# Altium PCB FPv1.3.5.PcbDoc (part 4 of 9)
Units mil, origin at the board's own origin, x right, y up, seen from the top; angles counter-clockwise.
Board outline 3200 x 2100 mil, 4 copper layers (Top Layer, GROUND PLANE, POWER PLANE, Bottom Layer); 98 components, 183 nets, 614 pads, 312 vias.
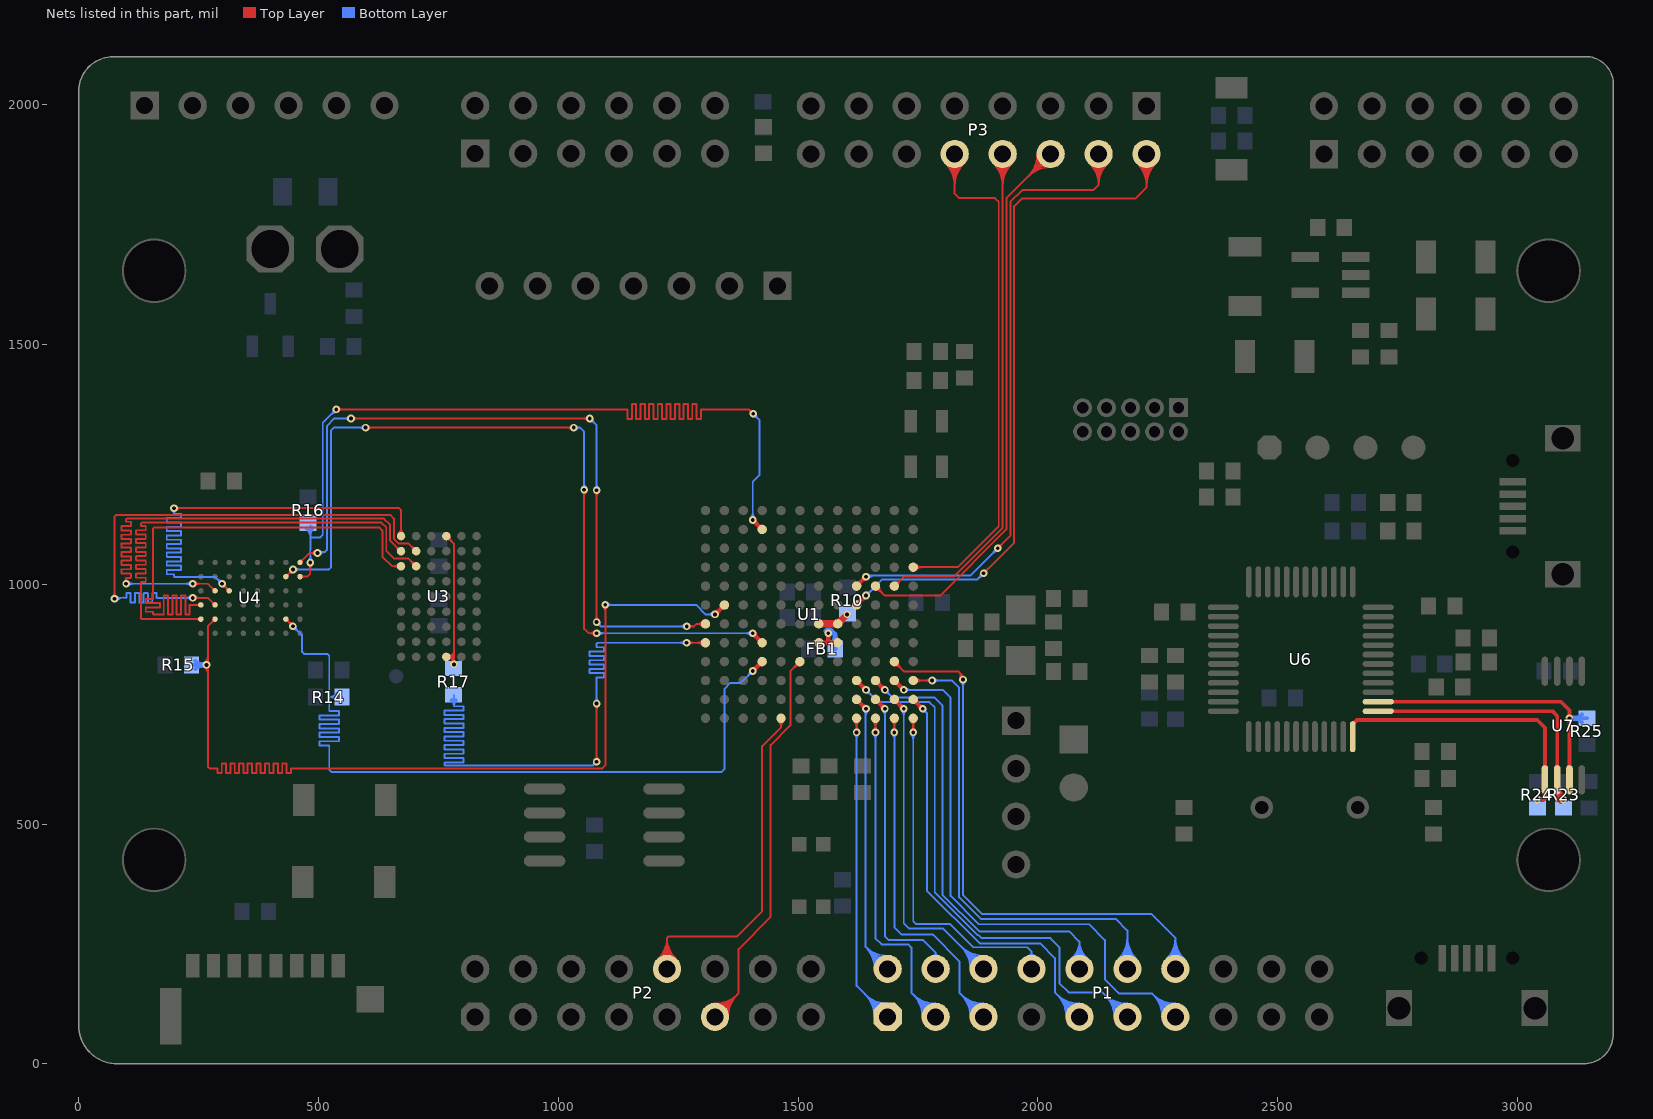
[diagram p6: the nets of this part, all layers, seen from the top]

## Via types
v1: diameter 15.87, hole 7.87, Top Layer to Bottom Layer, tented both sides, 261 vias
v2: diameter 19.8, hole 11.81, Top Layer to Bottom Layer, tented both sides, 25 vias
v3: diameter 23.62, hole 15.75, Top Layer to Bottom Layer, tented both sides, 11 vias
v4: diameter 20, hole 13, Top Layer to Bottom Layer, tented both sides, 5 vias
v5: diameter 27.68, hole 15.75, Top Layer to Bottom Layer, tented both sides, 3 vias
v6: diameter 23.74, hole 15.75, Top Layer to Bottom Layer, tented both sides, 2 vias
v7: diameter 19.8, hole 9.84, Top Layer to Bottom Layer, tented both sides, 2 vias
v8: diameter 23.62, hole 9.45, Top Layer to Bottom Layer, tented both sides, 1 vias
v9: diameter 17.24, hole 9.06, Top Layer to Bottom Layer, tented both sides, 1 vias
v10: diameter 23.74, hole 11.81, Top Layer to Bottom Layer, tented both sides, 1 vias

## Nets (pads, with @x,y where several pads share a name; then routed paths per layer and width w, separated by ;. In a path a pad name is that pad's centre, name@x,y a point inside that pad or via, vN(x,y) a via of type N, cw(c..) or ccw(c..) an arc to the next point about the centre after c; other vN are vias at no path point) (continued)
ADDR11: U3.C1 U4.H4 | length 1243.9
  Top Layer w4: U4.H4@252.3,954.07 ccw(c245.97,947.74) 245.97,956.69 ccw(c245.97,965.65) U4.H4@252.3,959.32 ; U4.H4@254.92,956.69 232.4,956.69 ccw(c232.4,955.79) 231.5,955.79 231.5,937.59 cw(c230.6,937.59) 230.6,936.69 223.4,936.69 cw(c223.4,937.59) 222.5,937.59 222.5,975.79 ccw(c221.6,975.79) 221.6,976.69 214.4,976.69 ccw(c214.4,975.79) 213.5,975.79 213.5,937.59 cw(c212.6,937.59) 212.6,936.69 205.4,936.69 cw(c205.4,937.59) 204.5,937.59 204.5,975.79 ccw(c203.6,975.79) 203.6,976.69 196.4,976.69 ccw(c196.4,975.79) 195.5,975.79 195.5,937.59 cw(c194.6,937.59) 194.6,936.69 187.4,936.69 cw(c187.4,937.59) 186.5,937.59 186.5,975.79 ccw(c185.6,975.79) 185.6,976.69 178.4,976.69 ccw(c178.4,975.79) 177.5,975.79 177.5,937.59 cw(c176.6,937.59) 176.6,936.69 156.31,936.69 155,938 155,941.6 ccw(c154.1,941.6) 154.1,942.5 140.9,942.5 cw(c140.9,943.4) 140,943.4 140,950.6 cw(c140.9,950.6) 140.9,951.5 155,951.5 169.1,951.5 ccw(c169.1,952.4) 170,952.4 170,959.6 ccw(c169.1,959.6) 169.1,960.5 155,960.5 140.9,960.5 cw(c140.9,961.4) 140,961.4 140,968.6 cw(c140.9,968.6) 140.9,969.5 155,969.5 155,970 155,1116 157.43,1118.43 626.57,1118.43 633.39,1111.61 633.39,1057.56 653.54,1037.4 U3.C1@672.24,1037.4 ; U3.C1@667.39,1032.55 ccw(c655.69,1020.84) 655.69,1037.4 ccw(c655.69,1053.96) U3.C1@667.39,1042.25
ADDR12: U3.C2 U4.H5 | length 1252.9
  Top Layer w4: U4.H5@252.3,924.54 ccw(c245.97,918.21) 245.97,927.17 ccw(c245.97,936.12) U4.H5@252.3,929.79 ; U4.H5@254.92,927.17 131.82,927.17 130,928.98 130,1001 130,1003.6 cw(c130.9,1003.6) 130.9,1004.5 139.1,1004.5 ccw(c139.1,1005.4) 140,1005.4 140,1012.6 ccw(c139.1,1012.6) 139.1,1013.5 130,1013.5 120.9,1013.5 cw(c120.9,1014.4) 120,1014.4 120,1021.6 cw(c120.9,1021.6) 120.9,1022.5 130,1022.5 139.1,1022.5 ccw(c139.1,1023.4) 140,1023.4 140,1030.6 ccw(c139.1,1030.6) 139.1,1031.5 130,1031.5 120.9,1031.5 cw(c120.9,1032.4) 120,1032.4 120,1039.6 cw(c120.9,1039.6) 120.9,1040.5 130,1040.5 139.1,1040.5 ccw(c139.1,1041.4) 140,1041.4 140,1048.6 ccw(c139.1,1048.6) 139.1,1049.5 130,1049.5 120.9,1049.5 cw(c120.9,1050.4) 120,1050.4 120,1057.6 cw(c120.9,1057.6) 120.9,1058.5 130,1058.5 139.1,1058.5 ccw(c139.1,1059.4) 140,1059.4 140,1066.6 ccw(c139.1,1066.6) 139.1,1067.5 130,1067.5 120.9,1067.5 cw(c120.9,1068.4) 120,1068.4 120,1075.6 cw(c120.9,1075.6) 120.9,1076.5 130,1076.5 139.1,1076.5 ccw(c139.1,1077.4) 140,1077.4 140,1084.6 ccw(c139.1,1084.6) 139.1,1085.5 130,1085.5 120.9,1085.5 cw(c120.9,1086.4) 120,1086.4 120,1093.6 cw(c120.9,1093.6) 120.9,1094.5 130,1094.5 139.1,1094.5 ccw(c139.1,1095.4) 140,1095.4 140,1102.6 ccw(c139.1,1102.6) 139.1,1103.5 130,1103.5 120.9,1103.5 cw(c120.9,1104.4) 120,1104.4 120,1111.6 cw(c120.9,1111.6) 120.9,1112.5 130,1112.5 139.1,1112.5 ccw(c139.1,1113.4) 140,1113.4 140,1120.6 ccw(c139.1,1120.6) 139.1,1121.5 130.9,1121.5 cw(c130.9,1122.4) 130,1122.4 130,1126 132.43,1128.43 631.31,1128.43 641.39,1118.35 641.39,1069.61 657.85,1053.15 687.99,1053.15 U3.C2@703.74,1037.4 ; U3.C2@696.88,1037.4 ccw(c680.32,1037.4) 692.03,1049.11 ccw(c703.74,1060.82) U3.C2@703.74,1044.26
ADDR13: U3.B1 U4.G3 | length 1302.9
  Top Layer w4: v1@95.74,1005.96 ccw(c91.77,1012) 99,1012 ; v1(99,1001) 99,1012 ; v1@102.26,1005.96 cw(c106.23,1012) 99,1012 ; v1(238.19,1000.98) 269.68,1000.98 U4.G3@284.45,986.22 ; v1@242.38,996.79 cw(c252.51,986.66) 252.51,1000.98 cw(c252.51,1015.31) v1@242.38,1005.18 ; U4.G3@280.74,986.22 ccw(c271.79,986.22) 278.12,992.55 ccw(c284.45,998.88) U4.G3@284.45,989.93 ; 661.12,1079.19 cw(c650.83,1068.9) U3.B1@665.39,1068.9 ; U3.B1@672.24,1068.9 671.41,1068.9 649.39,1090.93 649.39,1123.61 636.47,1136.53 100.87,1136.53 99,1134.66 99,1131.06 ccw(c99.9,1131.06) 99.9,1130.16 108.1,1130.16 cw(c108.1,1129.26) 109,1129.26 109,1122.06 cw(c108.1,1122.06) 108.1,1121.16 99,1121.16 89.9,1121.16 ccw(c89.9,1120.26) 89,1120.26 89,1113.06 ccw(c89.9,1113.06) 89.9,1112.16 99,1112.16 108.1,1112.16 cw(c108.1,1111.26) 109,1111.26 109,1104.06 cw(c108.1,1104.06) 108.1,1103.16 99,1103.16 89.9,1103.16 ccw(c89.9,1102.26) 89,1102.26 89,1095.06 ccw(c89.9,1095.06) 89.9,1094.16 99,1094.16 108.1,1094.16 cw(c108.1,1093.26) 109,1093.26 109,1086.06 cw(c108.1,1086.06) 108.1,1085.16 99,1085.16 89.9,1085.16 ccw(c89.9,1084.26) 89,1084.26 89,1077.06 ccw(c89.9,1077.06) 89.9,1076.16 99,1076.16 108.1,1076.16 cw(c108.1,1075.26) 109,1075.26 109,1068.06 cw(c108.1,1068.06) 108.1,1067.16 99,1067.16 89.9,1067.16 ccw(c89.9,1066.26) 89,1066.26 89,1059.06 ccw(c89.9,1059.06) 89.9,1058.16 99,1058.16 108.1,1058.16 cw(c108.1,1057.26) 109,1057.26 109,1050.06 cw(c108.1,1050.06) 108.1,1049.16 99,1049.16 89.9,1049.16 ccw(c89.9,1048.26) 89,1048.26 89,1041.06 ccw(c89.9,1041.06) 89.9,1040.16 99,1040.16 108.1,1040.16 cw(c108.1,1039.26) 109,1039.26 109,1032.06 cw(c108.1,1032.06) 108.1,1031.16 99,1031.16 89.9,1031.16 ccw(c89.9,1030.26) 89,1030.26 89,1023.06 ccw(c89.9,1023.06) 89.9,1022.16 99,1022.16 108.1,1022.16 cw(c108.1,1021.26) 109,1021.26 109,1014.06 cw(c108.1,1014.06) 108.1,1013.16 99.9,1013.16 ccw(c99.9,1012.26) 99,1012.26 99,1012
  Bottom Layer w4: v1(99,1001) v1(238.19,1000.98) ; v1@103.2,996.8 cw(c113.29,986.71) 113.29,1000.98 ; v1@103.2,1005.2 ccw(c113.36,1015.36) 113.36,1000.98 ; v1@233.99,996.79 ccw(c223.87,986.66) 223.87,1000.98 ccw(c223.87,1015.31) v1@233.99,1005.18
ADDR14: U3.B2 U4.G4 | length 1345.2
  Top Layer w4: v1@70.61,973.68 ccw(c60.48,983.81) 74.8,983.81 ccw(c89.13,983.81) v1@79,973.68 ; v1(74.8,969.49) 74.8,1140.75 78.59,1144.53 649.47,1144.53 657.39,1136.61 657.39,1094.24 666.98,1084.65 687.99,1084.65 U3.B2@703.74,1068.9 ; v1(238.19,971.46) 269.68,971.46 U4.G4@284.45,956.69 ; v1@242.38,967.26 cw(c252.51,957.13) 252.51,971.46 cw(c252.51,985.78) v1@242.38,975.65 ; U4.G4@280.74,956.69 ccw(c271.79,956.69) 278.12,963.02 ccw(c284.45,969.35) U4.G4@284.45,960.4 ; U3.B2@696.88,1068.9 ccw(c680.32,1068.9) 692.03,1080.61 ccw(c703.74,1092.31) U3.B2@703.74,1075.76
  Bottom Layer w4: v1@76.22,968.18 cw(c84.39,960.63) 83.95,971.74 ; v1@76.77,971.46 99.5,972.36 ; v1@78.83,973.85 ccw(c84.17,979.63) 84.48,971.76 ; v1@79.16,965.46 cw(c94.42,951.37) 93.6,972.12 ; 98.6,971.46 ccw(c98.6,972.36) 99.5,972.36 ; v1@233.99,967.26 ccw(c223.87,957.13) 223.87,971.46 ccw(c223.87,985.78) v1@233.99,975.65 ; v1(238.19,971.46) 163.4,971.46 cw(c163.4,972.36) 162.5,972.36 162.5,980.56 ccw(c161.6,980.56) 161.6,981.46 154.4,981.46 ccw(c154.4,980.56) 153.5,980.56 153.5,962.36 cw(c152.6,962.36) 152.6,961.46 145.4,961.46 cw(c145.4,962.36) 144.5,962.36 144.5,980.56 ccw(c143.6,980.56) 143.6,981.46 136.4,981.46 ccw(c136.4,980.56) 135.5,980.56 135.5,962.36 cw(c134.6,962.36) 134.6,961.46 127.4,961.46 cw(c127.4,962.36) 126.5,962.36 126.5,980.56 ccw(c125.6,980.56) 125.6,981.46 118.4,981.46 ccw(c118.4,980.56) 117.5,980.56 117.5,962.36 cw(c116.6,962.36) 116.6,961.46 109.4,961.46 cw(c109.4,962.36) 108.5,962.36 108.5,980.56 ccw(c107.6,980.56) 107.6,981.46 100.4,981.46 ccw(c100.4,980.56) 99.5,980.56 99.5,972.36
ADDR15: U3.A1 U4.F3 | length 1329.1
  Top Layer w4: v1@203.01,1154.27 cw(c213.05,1144.24) 213.05,1158.43 ; v1@203.01,1162.66 ccw(c213.24,1172.88) 213.24,1158.43 ; v1@299.21,995.05 cw(c299.21,980.71) 309.35,990.85 cw(c319.48,1000.98) v1@305.15,1000.98 ; v1(299.21,1000.98) U4.F3@313.98,986.22 ; U4.F3@310.27,986.22 ccw(c301.31,986.22) 307.65,992.55 ccw(c313.98,998.88) U4.F3@313.98,989.93 ; U3.A1@667.39,1105.24 ccw(c655.69,1116.95) 672.24,1116.95 ccw(c688.8,1116.95) U3.A1@677.09,1105.24 ; U3.A1@672.24,1100.39 672.24,1154.53 668.35,1158.43 v1@198.78,1158.43 ; v1@198.78,1158.43 v1(198.82,1158.46)
  Bottom Layer w4: v1@195.6,1153.48 cw(c191.8,1147.58) 198.82,1147.58 ; v1(198.82,1158.46) 198.82,1147.58 ; v1@202.03,1153.48 ccw(c205.83,1147.58) 198.82,1147.58 ; v1@293.28,1000.98 ccw(c278.94,1000.98) 289.08,1011.12 ccw(c299.21,1021.25) v1@299.21,1006.92 ; v1(299.21,1000.98) 285.28,1014.92 200.08,1014.92 198.82,1016.18 198.82,1019.78 ccw(c197.92,1019.78) 197.92,1020.68 184.72,1020.68 cw(c184.72,1021.58) 183.82,1021.58 183.82,1028.78 cw(c184.72,1028.78) 184.72,1029.68 212.92,1029.68 ccw(c212.92,1030.58) 213.82,1030.58 213.82,1037.78 ccw(c212.92,1037.78) 212.92,1038.68 184.72,1038.68 cw(c184.72,1039.58) 183.82,1039.58 183.82,1046.78 cw(c184.72,1046.78) 184.72,1047.68 212.92,1047.68 ccw(c212.92,1048.58) 213.82,1048.58 213.82,1055.78 ccw(c212.92,1055.78) 212.92,1056.68 184.72,1056.68 cw(c184.72,1057.58) 183.82,1057.58 183.82,1064.78 cw(c184.72,1064.78) 184.72,1065.68 212.92,1065.68 ccw(c212.92,1066.58) 213.82,1066.58 213.82,1073.78 ccw(c212.92,1073.78) 212.92,1074.68 184.72,1074.68 cw(c184.72,1075.58) 183.82,1075.58 183.82,1082.78 cw(c184.72,1082.78) 184.72,1083.68 212.92,1083.68 ccw(c212.92,1084.58) 213.82,1084.58 213.82,1091.78 ccw(c212.92,1091.78) 212.92,1092.68 184.72,1092.68 cw(c184.72,1093.58) 183.82,1093.58 183.82,1100.78 cw(c184.72,1100.78) 184.72,1101.68 212.92,1101.68 ccw(c212.92,1102.58) 213.82,1102.58 213.82,1109.78 ccw(c212.92,1109.78) 212.92,1110.68 184.72,1110.68 cw(c184.72,1111.58) 183.82,1111.58 183.82,1118.78 cw(c184.72,1118.78) 184.72,1119.68 212.92,1119.68 ccw(c212.92,1120.58) 213.82,1120.58 213.82,1127.78 ccw(c212.92,1127.78) 212.92,1128.68 184.72,1128.68 cw(c184.72,1129.58) 183.82,1129.58 183.82,1136.78 cw(c184.72,1136.78) 184.72,1137.68 212.92,1137.68 ccw(c212.92,1138.58) 213.82,1138.58 213.82,1145.78 ccw(c212.92,1145.78) 212.92,1146.68 199.72,1146.68 cw(c199.72,1147.58) 198.82,1147.58
AGND: R10.2 U1.G6 U1.H6 | length 67.2
  Top Layer w15: U1.G6@1543.31,917.32 U1.H6@1582.68,917.32 v1(1602.36,937.01)
ALE: R17.2 U3.A4 U3.J4 | length 465
  Top Layer w4: U3.J4@766.73,848.43 U3.J4@773.62,848.43 ; U3.A4@766.73,1093.54 cw(c766.73,1076.99) 778.43,1088.69 cw(c790.16,1100.39) U3.A4@773.59,1100.39 ; U3.A4@766.73,1100.39 782.48,1084.64 782.48,1074.8 782.48,857.28 ; U3.J4@771.97,844 cw(c781.5,835.96) 781.5,848.43 ; U3.J4@771.97,852.85 ccw(c781.5,860.89) 781.5,848.43 ; v1@777.92,836.48 ccw(c773.35,840.28) 777.56,844.49 ; 780.66,841.39 cw(c776.73,837.47) v1@781,833.91 ; 781.5,844.62 cw(c770.53,844.62) 778.28,836.87 ccw(c768.16,847) 782.48,847 ccw(c796.8,847) v1@786.68,836.87 ; 781.5,848.42 ccw(c796.95,848.42) v1@786.49,837.05 ; U3.J4@773.62,848.43 778.05,852.85 ; U3.J4@773.62,848.43 781.5,848.43 ; U3.J4@773.62,848.43 777.56,844.49 ; 777.56,844.49 781.5,848.43 ; 777.56,844.49 781.5,840.55 ; 778.05,852.85 778.05,851.87 781.5,848.43 ; 778.05,852.85 781.5,856.3 ; 781.5,840.55 781.5,833.66 v1(782.48,832.68) ; 781.5,840.55 781.5,848.43 ; 781.5,840.55 782.48,839.57 v1(782.48,832.68) ; 781.5,848.43 781.5,856.3 ; 781.5,856.3 782.48,857.28 ; v1(782.48,832.68) 782.48,857.28
ANALOG1: P1.1 U1.J1 | length 1050.8
  Top Layer w4: U1.J1@1616.5,714.93 cw(c1603.11,701.54) 1622.05,701.54 cw(c1640.98,701.54) U1.J1@1627.59,714.93 ; v1@1617.85,695.2 ccw(c1607.72,705.32) 1622.05,705.32 ccw(c1636.37,705.32) v1@1626.24,695.2 ; v1(1622.05,691) U1.J1@1622.05,720.47
  Bottom Layer w4: v1@1617.85,686.8 cw(c1607.72,676.68) 1622.05,676.68 cw(c1636.37,676.68) v1@1626.24,686.8 ; v1(1622.05,691) 1622.05,162.6 P1.1@1686.81,97.83 ; P1.1@1659.28,97.83 ccw(c1592.83,97.83) 1639.82,144.83 ccw(c1686.81,191.82) P1.1@1686.81,125.36 ; P1.1@1663.28,97.83 ccw(c1606.48,97.83) 1646.65,138 ccw(c1686.81,178.16) P1.1@1686.81,121.36 ; P1.1@1667.28,97.83 ccw(c1620.14,97.83) 1653.48,131.17 ccw(c1686.81,164.51) P1.1@1686.81,117.36 ; P1.1@1671.28,97.83 ccw(c1633.8,97.83) 1660.3,124.34 ccw(c1686.81,150.85) P1.1@1686.81,113.36
ANALOG2: P1.2 U1.J2 | length 1067.6
  Top Layer w4: U1.J2@1622.05,752 cw(c1622.05,733.07) 1635.44,746.45 cw(c1648.82,759.84) U1.J2@1629.89,759.84 ; U1.J2@1622.05,759.84 v1(1641.73,740.16) ; U1.J2@1625.8,752.02 cw(c1614.89,733.12) v1@1635.99,738.65 ; U1.J2@1629.87,756.09 ccw(c1648.77,767) v1@1643.24,745.9 ; 1634.09,747.23 cw(c1627.92,736.54) v1@1639.86,739.67 ; 1634.28,747.12 cw(c1632.2,743.51) v1@1636.13,742.12 ; 1634.66,747.8 ccw(c1645.35,753.97) v1@1642.22,742.03 ; 1634.77,747.61 ccw(c1638.38,749.69) v1@1639.77,745.76 ; v1@1635.8,740.16 ccw(c1621.48,740.16) 1631.6,750.29 ccw(c1641.73,760.41) v1@1641.73,746.09 ; 1635.3,746.53 ccw(c1638.53,752.12) 1640.2,745.89 cw(c1638.53,752.12) 1635.3,746.53 ; 1635.36,746.59 cw(c1629.77,743.36) 1636,741.69 ccw(c1629.77,743.36) 1635.36,746.59
  Bottom Layer w4: v1@1637.54,735.96 cw(c1629.79,728.21) 1640.75,728.21 ; 1640.75,723.46 cw(c1658.43,723.46) v1@1645.93,735.96 ; v1@1640.75,741.14 1640.75,243.9 ; P1.2@1659.29,198.23 ccw(c1595.98,199.13) 1640.75,243.9 ; P1.2@1663.29,198.17 ccw(c1609.18,198.94) 1647.44,237.2 ccw(c1685.7,275.46) P1.2@1686.48,221.36 ; P1.2@1667.29,198.11 ccw(c1622.38,198.75) 1654.14,230.51 ccw(c1685.89,262.27) P1.2@1686.53,217.36 ; P1.2@1671.29,198.06 ccw(c1635.58,198.57) 1660.83,223.82 ccw(c1686.08,249.07) P1.2@1686.59,213.36 ; P1.2@1686.42,225.36 cw(c1685.52,288.66) 1640.75,243.9 ; P1.2@1686.81,197.83 1640.75,243.9
ANALOG3: P1.3 U1.K1 | length 1108.2
  Top Layer w4: U1.K1@1655.87,714.93 cw(c1642.48,701.54) 1661.42,701.54 cw(c1680.35,701.54) U1.K1@1666.96,714.93 ; v1@1657.22,695.2 ccw(c1647.09,705.32) 1661.42,705.32 ccw(c1675.74,705.32) v1@1665.61,695.2 ; v1(1661.42,691) U1.K1@1661.42,720.47
  Bottom Layer w4: v1@1657.22,686.8 cw(c1647.09,676.68) 1661.42,676.68 cw(c1675.74,676.68) v1@1665.61,686.8 ; v1(1661.42,691) 1661.42,261.81 1674.21,249.02 1729.33,249.02 1736.22,242.13 1736.22,148.43 P1.3@1786.81,97.83 ; P1.3@1759.28,97.83 ccw(c1692.83,97.83) 1739.82,144.83 ccw(c1786.81,191.82) P1.3@1786.81,125.36 ; P1.3@1763.28,97.83 ccw(c1706.48,97.83) 1746.65,138 ccw(c1786.81,178.16) P1.3@1786.81,121.36 ; P1.3@1767.28,97.83 ccw(c1720.14,97.83) 1753.48,131.17 ccw(c1786.81,164.51) P1.3@1786.81,117.36 ; P1.3@1771.28,97.83 ccw(c1733.8,97.83) 1760.3,124.34 ccw(c1786.81,150.85) P1.3@1786.81,113.36
ANALOG4: P1.4 U1.K2 | length 836.5
  Top Layer w4: U1.K2@1661.42,752 cw(c1661.42,733.07) 1674.81,746.45 cw(c1688.19,759.84) U1.K2@1669.26,759.84 ; U1.K2@1661.42,759.84 v1(1681.1,740.16) ; U1.K2@1665.17,752.02 cw(c1654.26,733.12) v1@1675.36,738.65 ; U1.K2@1669.24,756.09 ccw(c1688.14,767) v1@1682.61,745.9 ; 1673.46,747.23 cw(c1667.29,736.54) v1@1679.23,739.67 ; 1673.65,747.12 cw(c1671.57,743.51) v1@1675.5,742.12 ; 1674.03,747.8 ccw(c1684.72,753.97) v1@1681.59,742.03 ; 1674.14,747.61 ccw(c1677.75,749.69) v1@1679.14,745.76 ; v1@1675.17,740.16 ccw(c1660.85,740.16) 1670.97,750.29 ccw(c1681.1,760.41) v1@1681.1,746.09 ; 1674.67,746.53 ccw(c1677.9,752.12) 1679.57,745.89 cw(c1677.9,752.12) 1674.67,746.53 ; 1674.73,746.59 cw(c1669.14,743.36) 1675.37,741.69 ccw(c1669.14,743.36) 1674.73,746.59
  Bottom Layer w4: v1@1676.91,735.96 cw(c1666.78,725.83) 1681.1,725.83 cw(c1695.43,725.83) v1@1685.3,735.96 ; v1(1681.1,740.16) 1681.1,265.75 1689.1,257.75 1760.95,257.75 1786.81,231.89 ; P1.4@1781.04,224.75 ccw(c1779.51,231.89) 1786.81,231.89 ; P1.4@1786.81,197.83 1786.81,231.89 ; P1.4@1792.58,224.75 cw(c1794.11,231.89) 1786.81,231.89
ANALOG5: P1.5 U1.L1 | length 1139
  Top Layer w4: U1.L1@1695.24,714.93 cw(c1681.85,701.54) 1700.79,701.54 cw(c1719.72,701.54) U1.L1@1706.33,714.93 ; v1@1696.59,695.2 ccw(c1686.46,705.32) 1700.79,705.32 ccw(c1715.11,705.32) v1@1704.98,695.2 ; v1(1700.79,691) U1.L1@1700.79,720.47
  Bottom Layer w4: v1@1696.59,686.8 cw(c1686.46,676.68) 1700.79,676.68 cw(c1715.11,676.68) v1@1704.98,686.8 ; v1(1700.79,691) 1700.79,284.45 1715.55,269.68 1780.51,269.68 1836.61,213.58 1836.61,148.03 P1.5@1886.81,97.83 ; P1.5@1859.28,97.83 ccw(c1792.83,97.83) 1839.82,144.83 ccw(c1886.81,191.82) P1.5@1886.81,125.36 ; P1.5@1863.28,97.83 ccw(c1806.48,97.83) 1846.65,138 ccw(c1886.81,178.16) P1.5@1886.81,121.36 ; P1.5@1867.28,97.83 ccw(c1820.14,97.83) 1853.48,131.17 ccw(c1886.81,164.51) P1.5@1886.81,117.36 ; P1.5@1871.28,97.83 ccw(c1833.8,97.83) 1860.3,124.34 ccw(c1886.81,150.85) P1.5@1886.81,113.36
ANALOG6: P1.6 U1.L2 | length 1167.7
  Top Layer w4: U1.L2@1700.79,752 cw(c1700.79,733.07) 1714.18,746.45 cw(c1727.56,759.84) U1.L2@1708.63,759.84 ; U1.L2@1700.79,759.84 v1(1720.47,740.16) ; U1.L2@1704.54,752.02 cw(c1693.63,733.12) v1@1714.73,738.65 ; U1.L2@1708.61,756.09 ccw(c1727.51,767) v1@1721.98,745.9 ; 1712.83,747.23 cw(c1706.66,736.54) v1@1718.6,739.67 ; 1713.02,747.12 cw(c1710.94,743.51) v1@1714.87,742.12 ; 1713.4,747.8 ccw(c1724.09,753.97) v1@1720.96,742.03 ; 1713.51,747.61 ccw(c1717.12,749.69) v1@1718.51,745.76 ; v1@1714.54,740.16 ccw(c1700.22,740.16) 1710.34,750.29 ccw(c1720.47,760.41) v1@1720.47,746.09 ; 1714.04,746.53 ccw(c1717.27,752.12) 1718.94,745.89 cw(c1717.27,752.12) 1714.04,746.53 ; 1714.1,746.59 cw(c1708.51,743.36) 1714.74,741.69 ccw(c1708.51,743.36) 1714.1,746.59
  Bottom Layer w4: v1@1716.28,735.96 cw(c1706.15,725.83) 1720.47,725.83 cw(c1734.8,725.83) v1@1724.67,735.96 ; v1(1720.47,740.16) 1720.47,293.31 1731.3,282.48 1802.17,282.48 P1.6@1886.81,197.83 ; P1.6@1859.28,197.83 ccw(c1792.83,197.83) 1839.82,244.83 ccw(c1886.81,291.82) P1.6@1886.81,225.36 ; P1.6@1863.28,197.83 ccw(c1806.48,197.83) 1846.65,238 ccw(c1886.81,278.16) P1.6@1886.81,221.36 ; P1.6@1867.28,197.83 ccw(c1820.14,197.83) 1853.48,231.17 ccw(c1886.81,264.51) P1.6@1886.81,217.36 ; P1.6@1871.28,197.83 ccw(c1833.8,197.83) 1860.3,224.34 ccw(c1886.81,250.85) P1.6@1886.81,213.36
ANALOG7: P1.8 U1.M1 | length 853
  Top Layer w4: U1.M1@1734.61,714.93 cw(c1721.22,701.54) 1740.16,701.54 cw(c1759.09,701.54) U1.M1@1745.7,714.93 ; v1@1735.8,695.2 ccw(c1725.3,705.7) 1740.16,705.7 ; v1@1740.16,691.16 U1.M1@1740.16,720.47 ; 1740.16,704.94 ccw(c1753.94,704.94) v1@1744.2,695.2
  Bottom Layer w4: v1@1735.8,686.8 cw(c1725.3,676.3) 1740.16,676.3 ; 1740.16,677.06 cw(c1753.94,677.06) v1@1744.2,686.8 ; v1@1740.16,691 1740.16,297.24 1746.06,291.34 1816.94,291.34 1865.32,242.96 1977.51,242.96 1986.81,233.66 ; P1.8@1979.72,224.43 ccw(c1977.26,233.66) 1986.81,233.66 ; P1.8@1980.75,220.57 ccw(c1978.65,228.45) 1986.81,228.45 ccw(c1994.97,228.45) P1.8@1992.87,220.57 ; P1.8@1986.81,197.83 1986.81,233.66 ; P1.8@1993.9,224.43 cw(c1996.36,233.66) 1986.81,233.66
  other v1: 1740,691
ANALOG8: P1.9 U1.M2 | length 1362.3
  Top Layer w4: U1.M2@1740.16,752 cw(c1740.16,733.07) 1753.55,746.45 cw(c1766.93,759.84) U1.M2@1748,759.84 ; U1.M2@1740.16,759.84 v1(1759.84,740.16) ; U1.M2@1743.91,752.02 cw(c1733,733.12) v1@1754.1,738.65 ; U1.M2@1747.98,756.09 ccw(c1766.88,767) v1@1761.35,745.9 ; 1752.2,747.23 cw(c1746.03,736.54) v1@1757.97,739.67 ; 1752.39,747.12 cw(c1750.31,743.51) v1@1754.24,742.12 ; 1752.77,747.8 ccw(c1763.46,753.97) v1@1760.33,742.03 ; 1752.88,747.61 ccw(c1756.49,749.69) v1@1757.88,745.76 ; v1@1753.91,740.16 ccw(c1739.59,740.16) 1749.71,750.29 ccw(c1759.84,760.41) v1@1759.84,746.09 ; 1753.41,746.53 ccw(c1756.64,752.12) 1758.31,745.89 cw(c1756.64,752.12) 1753.41,746.53 ; 1753.47,746.59 cw(c1747.88,743.36) 1754.11,741.69 ccw(c1747.88,743.36) 1753.47,746.59
  Bottom Layer w4: v1(1759.84,740.16) 1768.7,731.3 ; v1@1760.43,734.25 cw(c1761.45,724.05) 1768.7,731.3 ; v1@1765.75,739.57 ccw(c1775.95,738.55) 1768.7,731.3 ; P1.9@2059.28,97.83 ccw(c1992.83,97.83) 2039.82,144.83 ccw(c2086.81,191.82) P1.9@2086.81,125.36 ; P1.9@2063.28,97.83 ccw(c2006.48,97.83) 2046.65,138 ccw(c2086.81,178.16) P1.9@2086.81,121.36 ; P1.9@2067.28,97.83 ccw(c2020.14,97.83) 2053.48,131.17 ccw(c2086.81,164.51) P1.9@2086.81,117.36 ; P1.9@2071.28,97.83 ccw(c2033.8,97.83) 2060.3,124.34 ccw(c2086.81,150.85) P1.9@2086.81,113.36 ; P1.9@2086.81,97.83 2035.43,149.21 2035.43,220.57 2005.04,250.96 1878.96,250.96 1768.7,361.22 1768.7,731.3
ANALOG9: P1.10 U1.K3 | length 1353.2
  Top Layer w4: U1.K3@1661.42,791.37 cw(c1661.42,772.44) 1674.81,785.82 cw(c1688.19,799.21) U1.K3@1669.26,799.21 ; U1.K3@1661.42,799.21 v1(1681.1,779.53) ; U1.K3@1665.17,791.39 cw(c1654.26,772.49) v1@1675.36,778.02 ; U1.K3@1669.24,795.46 ccw(c1688.14,806.37) v1@1682.61,785.27 ; 1673.46,786.6 cw(c1667.29,775.91) v1@1679.23,779.04 ; 1673.65,786.49 cw(c1671.57,782.88) v1@1675.5,781.49 ; 1674.03,787.17 ccw(c1684.72,793.34) v1@1681.59,781.4 ; 1674.14,786.98 ccw(c1677.75,789.06) v1@1679.14,785.13 ; v1@1675.17,779.53 ccw(c1660.85,779.53) 1670.97,789.66 ccw(c1681.1,799.78) v1@1681.1,785.46 ; 1674.67,785.9 ccw(c1677.9,791.49) 1679.57,785.26 cw(c1677.9,791.49) 1674.67,785.9 ; 1674.73,785.96 cw(c1669.14,782.73) 1675.37,781.06 ccw(c1669.14,782.73) 1674.73,785.96
  Bottom Layer w4: v1@1681.1,773.59 cw(c1681.1,759.27) 1691.23,769.4 cw(c1701.36,779.53) v1@1687.04,779.53 ; v1(1681.1,779.53) 1696.63,764 1784.23,764 1801,747.23 1801,353 1878,276 2065.54,276 2086.81,254.72 ; P1.10@2069.73,219.42 ccw(c2041.79,254.72) 2086.81,254.72 ; P1.10@2072.21,216.28 ccw(c2048.34,246.46) 2086.81,246.46 ccw(c2125.29,246.46) P1.10@2101.41,216.28 ; P1.10@2074.69,213.15 ccw(c2054.88,238.19) 2086.81,238.19 ccw(c2118.75,238.19) P1.10@2098.93,213.15 ; P1.10@2077.18,210.01 ccw(c2061.42,229.92) 2086.81,229.92 ccw(c2112.2,229.92) P1.10@2096.45,210.01 ; P1.10@2086.81,197.83 2086.81,254.72 ; P1.10@2103.89,219.42 cw(c2131.83,254.72) 2086.81,254.72
ANALOG10: P1.11 U1.J3 | length 1636.4
  Top Layer w4: U1.J3@1622.05,791.37 cw(c1622.05,772.44) 1635.44,785.82 cw(c1648.82,799.21) U1.J3@1629.89,799.21 ; U1.J3@1622.05,799.21 v1(1641.73,779.53) ; U1.J3@1625.8,791.39 cw(c1614.89,772.49) v1@1635.99,778.02 ; U1.J3@1629.87,795.46 ccw(c1648.77,806.37) v1@1643.24,785.27 ; 1634.09,786.6 cw(c1627.92,775.91) v1@1639.86,779.04 ; 1634.28,786.49 cw(c1632.2,782.88) v1@1636.13,781.49 ; 1634.66,787.17 ccw(c1645.35,793.34) v1@1642.22,781.4 ; 1634.77,786.98 ccw(c1638.38,789.06) v1@1639.77,785.13 ; v1@1635.8,779.53 ccw(c1621.48,779.53) 1631.6,789.66 ccw(c1641.73,799.78) v1@1641.73,785.46 ; 1635.3,785.9 ccw(c1638.53,791.49) 1640.2,785.26 cw(c1638.53,791.49) 1635.3,785.9 ; 1635.36,785.96 cw(c1629.77,782.73) 1636,781.06 ccw(c1629.77,782.73) 1635.36,785.96
  Bottom Layer w4: v1@1641.73,773.59 cw(c1641.73,759.27) 1651.86,769.4 cw(c1661.99,779.53) v1@1647.67,779.53 ; v1(1641.73,779.53) 1667.26,754 1675.24,754 1675.33,754.09 1686.87,754.09 1686.96,754 1714.61,754 1714.7,754.09 1726.24,754.09 1726.33,754 1753.98,754 1754.07,754.09 1773.91,754.09 1785,743 1785,357.69 1874.69,268 1876.96,268 1882.96,262 2026,262 2045,243 2045,168 2064,149 2134.46,149 2185.63,97.83 P1.11@2186.81,97.83 ; 2137.8,145.66 ccw(c2186.81,194.67) P1.11@2186.81,125.36 ; 2140.65,142.81 cw(c2095.68,97.83) P1.11@2159.28,97.83 ; 2144.63,138.83 ccw(c2186.81,181.01) P1.11@2186.81,121.36 ; 2147.48,135.98 cw(c2109.33,97.83) P1.11@2163.28,97.83 ; 2151.46,132.01 ccw(c2186.81,167.36) P1.11@2186.81,117.36 ; 2154.31,129.15 cw(c2122.99,97.83) P1.11@2167.28,97.83 ; 2158.29,125.18 ccw(c2186.81,153.7) P1.11@2186.81,113.36 ; 2161.14,122.33 cw(c2136.65,97.83) P1.11@2171.28,97.83 ; 2165.12,118.35 ccw(c2186.81,140.04) P1.11@2186.81,109.36
ANALOG11: P1.12 U1.M3 | length 1399.8
  Top Layer w4: U1.M3@1740.16,799.21 v1(1779.53,799.21) ; U1.M3@1745.7,793.67 cw(c1759.09,780.28) 1759.09,799.21 cw(c1759.09,818.15) U1.M3@1745.7,804.76 ; v1@1775.33,795.02 ccw(c1765.2,784.89) 1765.2,799.21 ccw(c1765.2,813.54) v1@1775.33,803.41
  Bottom Layer w4: v1(1779.53,799.21) 1820.79,799.21 1836,784 1836,347 1881,302 2162.57,302 2186.81,277.76 P1.12@2186.81,197.83 ; v1@1783.72,795.02 cw(c1793.85,784.89) 1793.85,799.21 cw(c1793.85,813.54) v1@1783.72,803.41 ; P1.12@2167.35,217.3 ccw(c2120.35,264.29) 2186.81,264.29 ccw(c2253.27,264.29) P1.12@2206.28,217.3 ; P1.12@2170.17,214.47 ccw(c2130.01,254.64) 2186.81,254.64 ccw(c2243.61,254.64) P1.12@2203.45,214.47 ; P1.12@2173,211.64 ccw(c2139.67,244.98) 2186.81,244.98 ccw(c2233.95,244.98) P1.12@2200.62,211.64 ; P1.12@2175.83,208.81 ccw(c2149.32,235.32) 2186.81,235.32 ccw(c2224.3,235.32) P1.12@2197.79,208.81
ANALOG12: P1.13 U1.L3 | length 1653.7
  Top Layer w4: U1.L3@1700.79,791.37 cw(c1700.79,772.44) 1714.18,785.82 cw(c1727.56,799.21) U1.L3@1708.63,799.21 ; U1.L3@1700.79,799.21 v1(1720.47,779.53) ; U1.L3@1704.54,791.39 cw(c1693.63,772.49) v1@1714.73,778.02 ; U1.L3@1708.61,795.46 ccw(c1727.51,806.37) v1@1721.98,785.27 ; 1712.83,786.6 cw(c1706.66,775.91) v1@1718.6,779.04 ; 1713.02,786.49 cw(c1710.94,782.88) v1@1714.87,781.49 ; 1713.4,787.17 ccw(c1724.09,793.34) v1@1720.96,781.4 ; 1713.51,786.98 ccw(c1717.12,789.06) v1@1718.51,785.13 ; v1@1714.54,779.53 ccw(c1700.22,779.53) 1710.34,789.66 ccw(c1720.47,799.78) v1@1720.47,785.46 ; 1714.04,785.9 ccw(c1717.27,791.49) 1718.94,785.26 cw(c1717.27,791.49) 1714.04,785.9 ; 1714.1,785.96 cw(c1708.51,782.73) 1714.74,781.06 ccw(c1708.51,782.73) 1714.1,785.96
  Bottom Layer w4: v1(1720.47,779.53) 1801.47,779.53 1818,763 1818,350 1877,291 2107,291 2140,258 2140,176 2169.54,146.46 2238.19,146.46 P1.13@2286.81,97.83 ; v1@1724.67,775.33 cw(c1734.8,765.2) 1734.8,779.53 cw(c1734.8,793.85) v1@1724.67,783.72 ; P1.13@2259.28,97.83 ccw(c2192.83,97.83) 2239.82,144.83 ccw(c2286.81,191.82) P1.13@2286.81,125.36 ; P1.13@2263.28,97.83 ccw(c2206.48,97.83) 2246.65,138 ccw(c2286.81,178.16) P1.13@2286.81,121.36 ; P1.13@2267.28,97.83 ccw(c2220.14,97.83) 2253.48,131.17 ccw(c2286.81,164.51) P1.13@2286.81,117.36 ; P1.13@2271.28,97.83 ccw(c2233.8,97.83) 2260.3,124.34 ccw(c2286.81,150.85) P1.13@2286.81,113.36
ANALOG13: P1.14 U1.L4 | length 1550.4
  Top Layer w4: U1.L4@1700.79,830.74 cw(c1700.79,811.81) 1714.18,825.19 cw(c1727.56,838.58) U1.L4@1708.63,838.58 ; U1.L4@1700.79,838.58 1721.46,817.91 1834.65,817.91 ; v1@1838.34,802.79 ccw(c1824.04,807.31) 1834.65,817.91 ; 1839.3,813.25 cw(c1831.12,805.07) v1@1842.16,801.58 ; v1(1844,801) 1844,808.56 1834.65,817.91
  Bottom Layer w4: v1@1839.8,796.8 cw(c1829.68,786.68) 1844,786.68 cw(c1858.32,786.68) v1@1848.2,796.8 ; v1(1844,801) 1844,351.87 1883.86,312.01 2237.2,312.01 2286.81,262.4 ; P1.14@2267.75,217.7 ccw(c2224.86,262.4) 2286.81,262.4 ; P1.14@2270.52,214.81 ccw(c2233.86,253.02) 2286.81,253.02 ccw(c2339.76,253.02) P1.14@2303.1,214.81 ; P1.14@2273.29,211.92 ccw(c2242.86,243.64) 2286.81,243.64 ccw(c2330.76,243.64) P1.14@2300.33,211.92 ; P1.14@2276.06,209.04 ccw(c2251.87,234.25) 2286.81,234.25 ccw(c2321.76,234.25) P1.14@2297.56,209.04 ; P1.14@2286.81,197.83 2286.81,262.4 ; P1.14@2305.87,217.7 cw(c2348.76,262.4) 2286.81,262.4
AVDD: FB1.2 U1.G5 U1.H5 | length 210
  Top Layer w10: U1.G5@1543.31,877.95 U1.H5@1582.68,877.95 ; U1.G5@1546.73,874.53 cw(c1555,866.26) 1555,877.95 cw(c1555,889.64) U1.G5@1546.73,881.38 ; 1562.99,877.96 v1(1562.99,897.64) ; U1.H5@1579.25,874.53 ccw(c1570.99,866.26) 1570.99,877.95 ccw(c1570.99,889.64) U1.H5@1579.25,881.38
  Bottom Layer w10: v1@1558.07,902.71 cw(c1564.18,896.41) 1570.38,902.62 ; v1(1562.99,897.64) 1575.36,897.64 1577.56,895.44 ; v1@1565.04,895.53 cw(c1571.25,889.13) 1577.56,895.44 ; FB1.2@1569.96,874.57 ccw(c1551.61,892.92) 1577.56,892.92 ccw(c1603.51,892.92) FB1.2@1585.16,874.57 ; FB1.2@1577.56,865 1577.56,895.44
BE23_16: U1.A6 U4.A1 | length 1862.1
  Top Layer w4: U4.A1@461.61,1045.28 481.34,1065 v1(498,1065) ; U4.A1@461.61,1048.98 ccw(c461.61,1057.94) 467.95,1051.61 ccw(c474.28,1045.28) U4.A1@465.32,1045.28 ; v1@493.8,1060.8 ccw(c483.68,1050.68) 483.68,1065 ccw(c483.68,1079.32) v1@493.8,1069.2 ; v1(567.91,1345.47) v1(1065.94,1345.47) ; v1@572.11,1341.28 cw(c582.24,1331.15) 582.24,1345.47 cw(c582.24,1359.8) v1@572.11,1349.67 ; v1@1061.75,1341.28 ccw(c1051.62,1331.15) 1051.62,1345.47 ccw(c1051.62,1359.8) v1@1061.75,1349.67 ; v1@1075.8,925.2 ccw(c1065.68,935.32) 1080,935.32 ccw(c1094.32,935.32) v1@1084.2,925.2 ; v1@1075.8,1191.8 cw(c1065.68,1181.68) 1080,1181.68 cw(c1094.32,1181.68) v1@1084.2,1191.8 ; v1@1080,917 v1(1080,1196) ; v1@1267.72,917.32 1268,917.04 v1(1268,912) 1283,912 1288.32,917.32 ; v1@1272.2,907.8 cw(c1282.32,897.68) 1282.32,912 cw(c1282.32,926.32) v1@1272.2,916.2 ; U1.A6@1301.51,911.81 ccw(c1288.32,898.8) 1288.32,917.32 ; U1.A6@1301.51,922.83 cw(c1288.32,935.85) 1288.32,917.32 ; U1.A6@1307.09,917.32 1288.32,917.32
  Bottom Layer w4: v1(498,1065) 496,1067 513,1067 ; v1@502.2,1069.2 ccw(c507.5,1074.5) 507.5,1067 ; v1@502.9,1061.66 cw(c513,1054.79) 513,1067 ; v1@563.72,1341.28 ccw(c553.59,1331.15) 553.59,1345.47 ccw(c553.59,1359.8) v1@563.72,1349.67 ; v1(567.91,1345.47) 533.46,1345.47 517.72,1329.72 517.72,1071.72 513,1067 ; v1@1065.94,1339.54 cw(c1065.94,1325.22) 1076.07,1335.34 cw(c1086.2,1345.47) v1@1071.88,1345.47 ; v1(1065.94,1345.47) 1080,1331.42 v1@1080,1195.27 ; v1@1075.8,1200.2 ccw(c1065.68,1210.32) 1080,1210.32 ccw(c1094.32,1210.32) v1@1084.2,1200.2 ; v1(1080,921) 1089,912 ; v1@1080.52,915.09 cw(c1081.44,904.45) 1089,912 ; v1@1085.91,920.48 ccw(c1096.55,919.56) 1089,912 ; v1@1263.8,907.8 ccw(c1253.68,897.68) 1253.68,912 ccw(c1253.68,926.32) v1@1263.8,916.2 ; v1(1268,912) 1089,912
BE31_24: U1.D5 U4.B2 | length 2113.3
  Top Layer w4: U4.B2@432.09,1015.75 v1(447,1030.67) ; U4.B2@432.09,1019.46 ccw(c432.09,1028.41) 438.42,1022.08 ccw(c444.75,1015.75) U4.B2@435.8,1015.75 ; v1@441.07,1030.67 cw(c426.75,1030.67) 436.88,1020.54 cw(c447,1010.41) v1@447,1024.73 ; v1(598.43,1326.44) v1(1032.48,1326.44) ; v1@602.62,1322.25 cw(c612.75,1312.12) 612.75,1326.44 cw(c612.75,1340.77) v1@602.62,1330.64 ; v1@1028.29,1322.25 ccw(c1018.16,1312.12) 1018.16,1326.44 ccw(c1018.16,1340.77) v1@1028.29,1330.64 ; v1@1049.8,1192.8 cw(c1039.35,1182.35) 1054.13,1182.35 ; 1054.13,1183 cw(c1068,1183) v1@1058.2,1192.8 ; v1@1054.13,1197 1054.13,906.87 1063.36,897.64 v1(1080,897.64) ; v1@1075.8,893.44 ccw(c1065.68,883.31) 1065.68,897.64 ccw(c1065.68,911.96) v1@1075.8,901.83 ; v1@1404.01,891.9 cw(c1398.48,870.79) U1.D5@1417.37,881.7 ; v1@1405.02,895.77 cw(c1401.89,883.83) 1412.58,890 ; v1@1405.51,891.7 cw(c1405.51,877.38) 1415.64,887.51 cw(c1425.77,897.64) v1@1411.44,897.64 ; v1(1405.51,897.64) U1.D5@1425.2,877.95 ; v1@1407.38,898.13 ccw(c1419.32,901.26) 1413.15,890.57 ; v1@1407.48,892.04 cw(c1408.86,888.1) 1412.47,890.19 ; v1@1411.11,895.67 ccw(c1415.05,894.29) 1412.96,890.68 ; v1@1411.25,899.14 ccw(c1432.36,904.67) U1.D5@1421.45,885.78 ; U1.D5@1417.35,877.95 ccw(c1398.42,877.95) 1411.81,891.34 ccw(c1425.2,904.73) U1.D5@1425.2,885.8 ; v1@1407.05,891.91 cw(c1408.72,885.67) 1411.94,891.26 ccw(c1408.72,885.67) v1@1407.05,891.91 ; v1@1411.24,896.1 ccw(c1417.48,894.43) 1411.89,891.2 cw(c1417.48,894.43) v1@1411.24,896.1
  Bottom Layer w4: v1(447,1030.67) 521.67,1030.67 526.45,1035.45 526.45,1320.74 532.15,1326.44 v1(598.43,1326.44) ; v1@451.2,1026.47 cw(c461.33,1016.34) 461.33,1030.67 cw(c461.33,1044.99) v1@451.2,1034.86 ; v1@594.23,1322.25 ccw(c584.1,1312.12) 584.1,1326.44 ccw(c584.1,1340.77) v1@594.23,1330.64 ; v1(1032.48,1326.44) 1045.6,1326.44 ; v1@1036.93,1322.52 cw(c1045.6,1314.9) 1045.6,1326.44 ; v1@1036.93,1330.36 ccw(c1045.6,1337.99) 1045.6,1326.44 ; v1@1049.8,1201.2 ccw(c1039.35,1211.65) 1054.13,1211.65 ; v1@1054.13,1196 1054.13,1317.91 1045.6,1326.44 ; 1054.13,1211 ccw(c1068,1211) v1@1058.2,1201.2 ; v1(1080,897.64) v1(1405.51,897.64) ; v1@1084.2,893.44 cw(c1094.32,883.31) 1094.32,897.64 cw(c1094.32,911.96) v1@1084.2,901.83 ; v1@1401.32,893.44 ccw(c1391.19,883.31) 1391.19,897.64 ccw(c1391.19,911.96) v1@1401.32,901.83
  other v1: 1054,1197
EECLK: R23.2 U6.1 U7.2 | length 633.9
  Top Layer w8: U6.1@2709.65,735.24 3072.83,735.24 3082.84,725.24 U7.2@3082.84,592.17 ; U7.2@3080.79,617.83 ccw(c3075.86,622.76) 3082.84,622.76 ccw(c3089.81,622.76) U7.2@3084.88,617.83
  Top Layer w10: U7.2@3082.84,564.63 ccw(c3108.92,564.63) v1@3090.48,546.18 ; U7.2@3082.84,588.77 ccw(c3133.06,588.77) v1@3097.55,553.26 ; U7.2@3082.84,592.17 3082.84,552.99 3084.65,551.18 v1(3095.47,551.18)
EECS: R24.2 U6.48 U7.1 | length 632
  Top Layer w8: U6.48@2656.5,682.09 2656.5,707.68 2665.35,716.54 3041.34,716.54 3057.24,700.63 U7.1@3057.24,592.17 ; U6.48@2656.5,710.57 ccw(c2656.5,717.54) 2661.43,712.61 ; U7.1@3055.2,617.83 ccw(c3050.27,622.76) 3057.24,622.76 ccw(c3064.22,622.76) U7.1@3059.29,617.83
  Top Layer w10: v1(3041.34,551.18) 3054.13,551.18 3057.24,554.29 ; v1@3043.16,553.48 ccw(c3049.75,561.79) 3057.24,554.29 ; U7.1@3057.24,592.17 3057.24,554.29
EEDATA: R25.1 U6.2 U7.3 | length 711.1
  Top Layer w8: U6.2@2709.65,754.92 3090.55,754.92 3108.43,737.05 3108.43,719.49 U7.3@3108.43,592.17 ; v1@3105.49,717.69 cw(c3098.39,710.6) 3108.43,710.6 ; v1@3105.49,723.25 ccw(c3098.39,730.35) 3108.43,730.35 ; U7.3@3106.38,617.83 ccw(c3101.45,622.76) 3108.43,622.76 ccw(c3115.4,622.76) U7.3@3110.47,617.83 ; 3108.43,711.36 cw(c3117.38,711.36) v1@3111.05,717.69 ; 3108.43,729.59 ccw(c3117.38,729.59) v1@3111.05,723.25
  Bottom Layer w8: v1(3108.27,720.47) R25.1@3144.69,720.47 ; v1@3110.23,717.07 cw(c3117.67,704.19) 3121.52,718.55 ; v1@3110.23,723.88 ccw(c3117.67,736.76) 3121.52,722.39 ; v1@3111.05,717.69 cw(c3117.76,710.98) 3117.76,720.47 cw(c3117.76,729.97) v1@3111.05,723.25 ; R25.1@3134.41,712.17 ccw(c3114.35,692.11) 3114.35,720.47 ccw(c3114.35,748.83) R25.1@3134.41,728.78
FB_ALE: R17.1 U1.A5 | length 1896.8
  Top Layer w4: v1@1075.8,634.2 ccw(c1065.68,644.32) 1080,644.32 ccw(c1094.32,644.32) v1@1084.2,634.2 ; v1@1075.8,746.8 cw(c1065.68,736.68) 1080,736.68 cw(c1094.32,736.68) v1@1084.2,746.8 ; v1(1080,630) v1(1080,751) ; v1(1267.72,877.95) U1.A5@1307.09,877.95 ; v1@1271.91,873.76 cw(c1282.04,863.63) 1282.04,877.95 cw(c1282.04,892.28) v1@1271.91,882.15 ; U1.A5@1301.54,872.41 ccw(c1288.15,859.02) 1288.15,877.95 ccw(c1288.15,896.89) U1.A5@1301.54,883.5
  Bottom Layer w4: R17.1@775.43,757.37 cw(c768.97,745.5) 782.48,745.5 ; R17.1@777.34,760.88 cw(c772.63,752.23) 782.48,752.23 ; 782.48,752.72 cw(c792.46,752.72) R17.1@787.17,761.18 ; R17.1@782.48,769.44 782.48,745.5 ; R17.1@789.29,757.78 ccw(c796.97,745.5) 782.48,745.5 ; v1@1074.16,628.93 cw(c1066.47,627.53) 1072,622 ; v1@1075.8,755.2 ccw(c1065.68,765.32) 1080,765.32 ccw(c1094.32,765.32) v1@1084.2,755.2 ; v1@1078.93,624.16 ccw(c1077.53,616.47) 1072,622 ; v1(1080,630) 1072,622 ; v1(1080,751) 1080,805.5 1095,805.5 1095,814.5 1065,814.5 1065,823.5 1095,823.5 1095,832.5 1065,832.5 1065,841.5 1095,841.5 1095,850.5 1065,850.5 1065,859.5 1095,859.5 1095,868.5 1080,868.5 1080,876 1081.95,877.95 v1(1267.72,877.95) ; v1@1263.52,873.76 ccw(c1253.39,863.63) 1253.39,877.95 ccw(c1253.39,892.28) v1@1263.52,882.15 ; 782.48,745.5 802.48,745.5 802.48,736.5 762.48,736.5 762.48,727.5 802.48,727.5 802.48,718.5 762.48,718.5 762.48,709.5 802.48,709.5 802.48,700.5 762.48,700.5 762.48,691.5 802.48,691.5 802.48,682.5 762.48,682.5 762.48,673.5 802.48,673.5 802.48,664.5 762.48,664.5 762.48,655.5 802.48,655.5 802.48,646.5 762.48,646.5 762.48,637.5 802.48,637.5 802.48,628.5 764.5,628.5 763,627 763,623 764,622 1072,622
FB_CS0: R14.1 U1.D4 U4.B5 | length 2105.3
  Top Layer w4: U4.B5@432.09,923.46 cw(c432.09,914.5) 438.42,920.83 cw(c444.75,927.17) U4.B5@435.8,927.17 ; U4.B5@432.09,927.17 v1(446.85,912.4) ; v1@440.92,912.4 ccw(c426.6,912.4) 436.73,922.53 ccw(c446.85,932.65) v1@446.85,918.33 ; v1@1404.01,824.64 ccw(c1398.48,845.74) U1.D4@1417.37,834.83 ; v1@1405.02,820.77 ccw(c1401.89,832.71) 1412.58,826.54 ; v1(1405.51,818.9) U1.D4@1425.2,838.58 ; v1@1405.51,824.83 ccw(c1405.51,839.15) 1415.64,829.03 ccw(c1425.77,818.9) v1@1411.44,818.9 ; v1@1407.38,818.41 cw(c1419.32,815.28) 1413.15,825.97 ; v1@1407.48,824.5 ccw(c1408.86,828.43) 1412.47,826.35 ; v1@1411.11,820.86 cw(c1415.05,822.25) 1412.96,825.86 ; v1@1411.25,817.39 cw(c1432.36,811.86) U1.D4@1421.45,830.76 ; U1.D4@1417.35,838.58 cw(c1398.42,838.58) 1411.81,825.19 cw(c1425.2,811.81) U1.D4@1425.2,830.74 ; v1@1407.05,824.63 ccw(c1408.72,830.86) 1411.94,825.27 cw(c1408.72,830.86) v1@1407.05,824.63 ; v1@1411.24,820.43 cw(c1417.48,822.1) 1411.89,825.33 ccw(c1417.48,822.1) v1@1411.24,820.43
  Bottom Layer w4: v1@446.85,906.46 cw(c446.85,892.14) 456.98,902.27 cw(c467.11,912.4) v1@452.79,912.4 ; v1(446.85,912.4) 465.8,893.45 465.8,859 470.32,854.48 518.55,854.48 522.64,850.39 522.64,735.5 542.64,735.5 542.64,726.5 502.64,726.5 502.64,717.5 542.64,717.5 542.64,708.5 502.64,708.5 502.64,699.5 542.64,699.5 542.64,690.5 502.64,690.5 502.64,681.5 542.64,681.5 542.64,672.5 502.64,672.5 502.64,663.5 522.64,663.5 522.64,613.36 528,608 1340,608 1346.46,614.46 1346.46,781.46 1359,794 1380.61,794 v1(1405.51,818.9) ; R14.1@537.99,756.82 ccw(c522.64,745.96) 522.64,764.76 ; R14.1@537.99,772.71 cw(c522.64,783.57) 522.64,764.76 ; R14.1@541.26,759.13 ccw(c530.37,751.43) 530.37,764.76 ccw(c530.37,778.1) R14.1@541.26,770.4 ; R14.1@549.21,764.76 522.64,764.76 ; v1@1399.58,818.9 cw(c1385.26,818.9) 1395.38,808.77 cw(c1405.51,798.64) v1@1405.51,812.96
FB_OE: R16.1 U1.D11 U4.A2 | length 2469.4
  Top Layer w4: U4.A2@461.61,1015.75 476.75,1015.75 483,1022 v1(483,1045) ; U4.A2@464.24,1013.13 cw(c470.57,1006.79) 470.57,1015.75 cw(c470.57,1024.7) U4.A2@464.24,1018.37 ; v1@478.8,1040.8 cw(c468.68,1030.68) 483,1030.68 cw(c497.32,1030.68) v1@487.2,1040.8 ; v1(537.4,1364.5) 1144.5,1364.5 1144.5,1344.5 1153.5,1344.5 1153.5,1375.53 1162.5,1375.53 1162.5,1344.5 1171.5,1344.5 1171.5,1375.53 1180.5,1375.53 1180.5,1344.5 1189.5,1344.5 1189.5,1375.53 1198.5,1375.53 1198.5,1344.5 1207.5,1344.5 1207.5,1375.53 1216.5,1375.53 1216.5,1344.5 1225.5,1344.5 1225.5,1375.53 1234.5,1375.53 1234.5,1344.5 1243.5,1344.5 1243.5,1375.53 1252.5,1375.53 1252.5,1344.5 1261.5,1344.5 1261.5,1375.53 1270.5,1375.53 1270.5,1344.5 1279.5,1344.5 1279.5,1375.53 1288.5,1375.53 1288.5,1344.5 1297.5,1344.5 1297.5,1364.5 1397.31,1364.5 ; v1@541.6,1360.31 cw(c551.73,1350.18) 551.73,1364.5 cw(c551.73,1378.82) v1@541.6,1368.7 ; v1@1400.58,1355.74 ccw(c1389.35,1356.54) 1397.31,1364.5 ; v1@1404.01,1128.12 cw(c1398.48,1107.01) U1.D11@1417.37,1117.92 ; v1@1405.02,1131.99 cw(c1401.89,1120.05) 1412.58,1126.22 ; v1@1405.51,1127.93 cw(c1405.51,1113.6) 1415.64,1123.73 cw(c1425.77,1133.86) v1@1411.44,1133.86 ; v1(1405.51,1133.86) U1.D11@1425.2,1114.17 ; v1@1406.07,1361.23 cw(c1405.27,1372.46) 1397.31,1364.5 ; v1(1406.5,1355.31) 1397.31,1364.5 ; v1@1407.38,1134.35 ccw(c1419.32,1137.48) 1413.15,1126.79 ; v1@1407.48,1128.26 cw(c1408.86,1124.32) 1412.47,1126.41 ; v1@1411.11,1131.89 ccw(c1415.05,1130.51) 1412.96,1126.9 ; v1@1411.25,1135.36 ccw(c1432.36,1140.89) U1.D11@1421.45,1122 ; U1.D11@1417.35,1114.17 ccw(c1398.42,1114.17) 1411.81,1127.56 ccw(c1425.2,1140.95) U1.D11@1425.2,1122.02 ; v1@1407.05,1128.13 cw(c1408.72,1121.89) 1411.94,1127.48 ccw(c1408.72,1121.89) v1@1407.05,1128.13 ; v1@1411.24,1132.32 ccw(c1417.48,1130.65) 1411.89,1127.43 cw(c1417.48,1130.65) v1@1411.24,1132.32
  Bottom Layer w4: R16.1@473.21,1115.2 cw(c462.46,1097.38) 483.27,1097.38 ; R16.1@475.28,1118.62 cw(c466.74,1104.47) 483.27,1104.47 ; v1@478.83,1049.22 ccw(c468.75,1059.4) 483.07,1059.32 ccw(c497.4,1059.25) v1@487.22,1049.17 ; v1(483,1045) 483.27,1097.53 ; 483.27,1100.91 cw(c506.38,1100.91) R16.1@490.04,1117.25 ; 483.27,1110.56 cw(c496.72,1110.56) R16.1@487.21,1120.08 ; R16.1@483.27,1122.05 483.27,1097.53 ; v1@531.47,1364.5 cw(c517.15,1364.5) 527.27,1354.37 cw(c537.4,1344.24) v1@537.4,1358.57 ; v1(537.4,1364.5) 509.09,1336.19 509.09,1102.6 504.03,1097.53 483.27,1097.53 ; v1@1401.32,1138.05 ccw(c1391.19,1148.18) 1405.51,1148.18 ccw(c1419.84,1148.18) v1@1409.71,1138.05 ; v1(1405.51,1133.86) 1405.51,1213.51 1420,1228 1420,1341.81 v1(1406.5,1355.31) ; v1@1406.5,1349.38 cw(c1406.5,1335.06) 1416.62,1345.19 cw(c1426.75,1355.31) v1@1412.43,1355.31
FB_RW: R15.1 U1.B7 U4.G5 | length 2477.2
  Top Layer w4: v1@262.54,827.5 cw(c245.28,810.24) 269.68,810.24 ; v1@262.54,835.89 ccw(c245.28,853.14) 269.68,853.14 ; v1@265.37,830.33 cw(c254.94,819.9) 269.68,819.9 ; v1@265.37,833.06 ccw(c254.94,843.49) 269.68,843.49 ; U4.G5@280.74,927.17 cw(c271.79,927.17) 278.12,920.83 cw(c284.45,914.5) U4.G5@284.45,923.46 ; U4.G5@284.45,927.17 269.68,912.4 269.68,619.32 273,616 289.5,616 289.5,606 298.5,606 298.5,626 307.5,626 307.5,606 316.5,606 316.5,626 325.5,626 325.5,606 334.5,606 334.5,626 343.5,626 343.5,606 352.5,606 352.5,626 361.5,626 361.5,606 370.5,606 370.5,626 379.5,626 379.5,606 388.5,606 388.5,626 397.5,626 397.5,606 406.5,606 406.5,626 415.5,626 415.5,606 424.5,606 424.5,626 433.5,626 433.5,606 442.5,606 442.5,616 1092,616 1098.43,622.43 v1@1098.43,956.69 ; v1@1093.8,952.8 cw(c1082.65,941.65) 1098.43,941.65 ; 1098.43,943.7 cw(c1111.3,943.7) v1@1102.2,952.8 ; v1@1325.27,942.75 ccw(c1319.74,963.85) U1.B7@1338.63,952.94 ; v1@1326.28,938.88 ccw(c1323.15,950.82) 1333.84,944.65 ; v1(1326.77,937.01) U1.B7@1346.46,956.69 ; v1@1326.77,942.94 ccw(c1326.77,957.26) 1336.9,947.14 ccw(c1347.03,937.01) v1@1332.7,937.01 ; v1@1328.64,936.52 cw(c1340.58,933.39) 1334.41,944.08 ; v1@1328.74,942.61 ccw(c1330.12,946.54) 1333.73,944.46 ; v1@1332.37,938.97 cw(c1336.31,940.36) 1334.22,943.97 ; v1@1332.51,935.5 cw(c1353.62,929.97) U1.B7@1342.71,948.87 ; U1.B7@1338.61,956.69 cw(c1319.68,956.69) 1333.07,943.3 cw(c1346.46,929.92) U1.B7@1346.46,948.85 ; v1@1328.31,942.74 ccw(c1329.98,948.97) 1333.2,943.38 cw(c1329.98,948.97) v1@1328.31,942.74 ; v1@1332.5,938.54 cw(c1338.74,940.21) 1333.15,943.44 ccw(c1338.74,940.21) v1@1332.5,938.54
  Bottom Layer w4: v1@1098,956.69 1287.31,956.69 1306.99,937.01 v1(1326.77,937.01) ; v1@1102.2,952.8 cw(c1111.58,943.42) 1111.58,956.69 ; v1@1102.2,961.2 ccw(c1113.06,972.06) 1113.06,956.69 ; v1@1322.58,932.81 ccw(c1312.45,922.68) 1312.45,937.01 ccw(c1312.45,951.33) v1@1322.58,941.2
  Bottom Layer w8: R15.1@235.24,831.69 v1(266.73,831.69) ; R15.1@243.54,823.39 cw(c263.6,803.33) 263.6,831.69 cw(c263.6,860.06) R15.1@243.54,840 ; 255.46,829.51 cw(c258.63,817.67) v1@264.77,828.29 ; 255.46,833.87 ccw(c258.63,845.72) v1@264.77,835.1 ; v1@263.95,828.91 ccw(c257.24,822.2) 257.24,831.69 ccw(c257.24,841.19) v1@263.95,834.47
  other v1: 1098,957
FTM0_CH3: P3.2 U1.J7 | length 1977.8
  Top Layer w4: U1.J7@1622.05,956.69 v1(1641.73,976.38) ; U1.J7@1622.05,964.54 ccw(c1622.05,983.47) 1635.44,970.08 ccw(c1648.82,956.69) U1.J7@1629.89,956.69 ; U1.J7@1625.8,964.52 ccw(c1614.89,983.41) v1@1635.99,977.88 ; U1.J7@1629.87,960.44 cw(c1648.77,949.53) v1@1643.24,970.64 ; 1634.09,969.31 ccw(c1627.92,980) v1@1639.86,976.87 ; 1634.28,969.42 ccw(c1632.2,973.03) v1@1636.13,974.41 ; 1634.66,968.74 cw(c1645.35,962.57) v1@1642.22,974.51 ; 1634.77,968.93 cw(c1638.38,966.84) v1@1639.77,970.78 ; v1@1635.8,976.38 cw(c1621.48,976.38) 1631.6,966.25 cw(c1641.73,956.12) v1@1641.73,970.45 ; v1(1886.81,1022.64) 1950.61,1086.44 1950.61,1788.21 1966.54,1804.13 2202.76,1804.13 2226.61,1827.99 P3.2@2226.61,1897.05 ; v1@1886.81,1028.57 ccw(c1886.81,1042.89) 1896.94,1032.77 ccw(c1907.07,1022.64) v1@1892.74,1022.64 ; P3.2@2207.15,1877.58 cw(c2160.16,1830.59) 2226.61,1830.59 cw(c2293.07,1830.59) P3.2@2246.08,1877.58 ; P3.2@2209.98,1880.41 cw(c2169.81,1840.25) 2226.61,1840.25 cw(c2283.41,1840.25) P3.2@2243.25,1880.41 ; P3.2@2212.81,1883.24 cw(c2179.47,1849.9) 2226.61,1849.9 cw(c2273.76,1849.9) P3.2@2240.42,1883.24 ; P3.2@2215.63,1886.07 cw(c2189.13,1859.56) 2226.61,1859.56 cw(c2264.1,1859.56) P3.2@2237.59,1886.07 ; 1635.3,970 cw(c1638.53,964.41) 1640.2,970.65 ccw(c1638.53,964.41) 1635.3,970 ; 1635.36,969.94 ccw(c1629.77,973.17) 1636,974.84 cw(c1629.77,973.17) 1635.36,969.94
  Bottom Layer w4: v1(1641.73,976.38) 1675.35,1010 1874.17,1010 v1(1886.81,1022.64) ; v1@1641.73,982.31 ccw(c1641.73,996.63) 1651.86,986.51 ccw(c1661.99,976.38) v1@1647.67,976.38 ; v1@1880.88,1022.64 cw(c1866.55,1022.64) 1876.68,1012.51 cw(c1886.81,1002.38) v1@1886.81,1016.7
FTM0_CH4: P3.4 U1.J8 | length 1844.2
  Top Layer w4: U1.J8@1622.05,996.06 v1(1641.73,1015.75) ; U1.J8@1622.05,1003.91 ccw(c1622.05,1022.84) 1635.44,1009.45 ccw(c1648.82,996.06) U1.J8@1629.89,996.06 ; U1.J8@1625.8,1003.89 ccw(c1614.89,1022.78) v1@1635.99,1017.25 ; U1.J8@1629.87,999.81 cw(c1648.77,988.9) v1@1643.24,1010.01 ; 1634.09,1008.68 ccw(c1627.92,1019.37) v1@1639.86,1016.24 ; 1634.28,1008.79 ccw(c1632.2,1012.4) v1@1636.13,1013.78 ; 1634.66,1008.11 cw(c1645.35,1001.94) v1@1642.22,1013.88 ; 1634.77,1008.3 cw(c1638.38,1006.21) v1@1639.77,1010.15 ; v1@1635.8,1015.75 cw(c1621.48,1015.75) 1631.6,1005.62 cw(c1641.73,995.49) v1@1641.73,1009.82 ; v1(1916.34,1074.8) 1942.61,1101.08 1942.61,1796.94 1967.52,1821.85 2115.16,1821.85 2126.61,1833.31 ; v1@1916.34,1080.74 ccw(c1916.34,1095.06) 1926.47,1084.93 ccw(c1936.6,1074.8) v1@1922.27,1074.8 ; P3.4@2107.74,1877.01 cw(c2066.59,1833.31) 2126.61,1833.31 ; P3.4@2110.48,1879.92 cw(c2075.31,1842.57) 2126.61,1842.57 cw(c2177.92,1842.57) P3.4@2142.74,1879.92 ; P3.4@2113.23,1882.83 cw(c2084.03,1851.83) 2126.61,1851.83 cw(c2169.19,1851.83) P3.4@2140,1882.83 ; P3.4@2115.97,1885.74 cw(c2092.76,1861.09) 2126.61,1861.09 cw(c2160.47,1861.09) P3.4@2137.26,1885.74 ; P3.4@2126.61,1897.05 2126.61,1833.31 ; P3.4@2145.49,1877.01 ccw(c2186.64,1833.31) 2126.61,1833.31 ; 1635.3,1009.37 cw(c1638.53,1003.78) 1640.2,1010.02 ccw(c1638.53,1003.78) 1635.3,1009.37 ; 1635.36,1009.32 ccw(c1629.77,1012.54) 1636,1014.21 cw(c1629.77,1012.54) 1635.36,1009.32
  Bottom Layer w4: v1(1641.73,1015.75) 1643.98,1018 1859.53,1018 v1(1916.34,1074.8) ; v1@1643.1,1014.38 cw(c1651.83,1005.65) 1651.83,1018 ; v1@1645.93,1011.55 cw(c1661.48,996) 1661.48,1018 ; v1@1645.93,1019.94 ccw(c1650.63,1024.64) 1650.63,1018 ; v1@1910.41,1074.8 cw(c1896.08,1074.8) 1906.21,1064.67 cw(c1916.34,1054.55) v1@1916.34,1068.87
FTM1_QDA: P3.6 U1.K8 | length 1515.7
  Top Layer w4: U1.K8@1661.42,988.22 cw(c1661.42,969.29) 1674.81,982.68 cw(c1688.19,996.06) U1.K8@1669.26,996.06 ; U1.K8@1661.42,996.06 1681.1,976.38 1796.74,976.38 1934.61,1114.26 1934.61,1805.05 P3.6@2026.61,1897.05 ; P3.6@1999.09,1897.05 cw(c1932.63,1897.05) 1979.62,1850.05 cw(c2026.61,1803.06) P3.6@2026.61,1869.52 ; P3.6@2003.09,1897.05 cw(c1946.29,1897.05) 1986.45,1856.88 cw(c2026.61,1816.72) P3.6@2026.61,1873.52 ; P3.6@2007.09,1897.05 cw(c1959.94,1897.05) 1993.28,1863.71 cw(c2026.61,1830.38) P3.6@2026.61,1877.52 ; P3.6@2011.09,1897.05 cw(c1973.6,1897.05) 2000.11,1870.54 cw(c2026.61,1844.03) P3.6@2026.61,1881.52
FTM1_QDB: P3.8 U1.L8 | length 1411.9
  Top Layer w4: U1.L8@1700.79,996.06 1720.47,1015.75 1824.79,1015.75 1926.61,1117.57 P3.8@1926.61,1897.05 ; U1.L8@1700.79,1003.91 ccw(c1700.79,1022.84) 1714.18,1009.45 ccw(c1727.56,996.06) U1.L8@1708.63,996.06 ; P3.8@1907.15,1877.58 cw(c1860.16,1830.59) 1926.61,1830.59 cw(c1993.07,1830.59) P3.8@1946.08,1877.58 ; P3.8@1909.98,1880.41 cw(c1869.81,1840.25) 1926.61,1840.25 cw(c1983.41,1840.25) P3.8@1943.25,1880.41 ; P3.8@1912.81,1883.24 cw(c1879.47,1849.9) 1926.61,1849.9 cw(c1973.76,1849.9) P3.8@1940.42,1883.24 ; P3.8@1915.63,1886.07 cw(c1889.13,1859.56) 1926.61,1859.56 cw(c1964.1,1859.56) P3.8@1937.59,1886.07
FTM2_QDA: P3.10 U1.M9 | length 1428.1
  Top Layer w4: U1.M9@1740.16,1035.43 1833.16,1035.43 1918.43,1120.7 1918.43,1797.12 1910.43,1805.12 1835.63,1805.12 1826.61,1814.13 P3.10@1826.61,1897.05 ; U1.M9@1745.7,1029.89 cw(c1759.09,1016.5) 1759.09,1035.43 cw(c1759.09,1054.37) U1.M9@1745.7,1040.98 ; P3.10@1807.15,1877.58 cw(c1760.16,1830.59) 1826.61,1830.59 cw(c1893.07,1830.59) P3.10@1846.08,1877.58 ; P3.10@1809.98,1880.41 cw(c1769.81,1840.25) 1826.61,1840.25 cw(c1883.41,1840.25) P3.10@1843.25,1880.41 ; P3.10@1812.81,1883.24 cw(c1779.47,1849.9) 1826.61,1849.9 cw(c1873.76,1849.9) P3.10@1840.42,1883.24 ; P3.10@1815.63,1886.07 cw(c1789.13,1859.56) 1826.61,1859.56 cw(c1864.1,1859.56) P3.10@1837.59,1886.07
FTM3_CH1: P2.10 U1.E1 | length 1050.2
  Top Layer w4: P2.10@1207.66,217.61 ccw(c1163.9,262.81) 1226.81,262.81 ; P2.10@1210.44,214.74 ccw(c1173.04,253.37) 1226.81,253.37 ccw(c1280.58,253.37) P2.10@1243.18,214.74 ; P2.10@1213.23,211.86 ccw(c1182.18,243.93) 1226.81,243.93 ccw(c1271.44,243.93) P2.10@1240.4,211.86 ; P2.10@1216.01,208.99 ccw(c1191.32,234.48) 1226.81,234.48 ccw(c1262.3,234.48) P2.10@1237.61,208.99 ; P2.10@1226.81,197.83 1226.81,262.81 ; P2.10@1245.96,217.61 cw(c1289.73,262.81) 1226.81,262.81 ; U1.E1@1459.03,714.92 cw(c1445.7,701.57) 1464.57,701.57 ; U1.E1@1464.57,720.47 1464.57,701.57 ; U1.E1@1470.11,714.92 ccw(c1483.43,701.57) 1464.57,701.57 ; 1226.81,262.81 1229.75,265.75 1373.03,265.75 1425.2,317.91 1425.2,662.2 1464.57,701.57
FTM3_CH2: P2.11 U1.F4 | length 1170.4
  Top Layer w4: P2.11@1326.81,97.83 1375.98,147.01 1375.98,239.17 1442.91,306.1 1442.91,664.37 1484.25,705.71 1484.25,818.9 U1.F4@1503.94,838.58 ; P2.11@1326.81,113.36 ccw(c1326.81,150.85) 1353.32,124.34 ccw(c1379.83,97.83) P2.11@1342.34,97.83 ; P2.11@1326.81,117.36 ccw(c1326.81,164.51) 1360.15,131.17 ccw(c1393.48,97.83) P2.11@1346.34,97.83 ; P2.11@1326.81,121.36 ccw(c1326.81,178.16) 1366.97,138 ccw(c1407.14,97.83) P2.11@1350.34,97.83 ; P2.11@1326.81,125.36 ccw(c1326.81,191.82) 1373.8,144.83 ccw(c1420.8,97.83) P2.11@1354.34,97.83 ; U1.F4@1496.09,838.58 cw(c1477.16,838.58) 1490.55,825.19 cw(c1503.94,811.81) U1.F4@1503.94,830.74